# EAGLE board programmer_pcb (EAGLE 9.5.2)
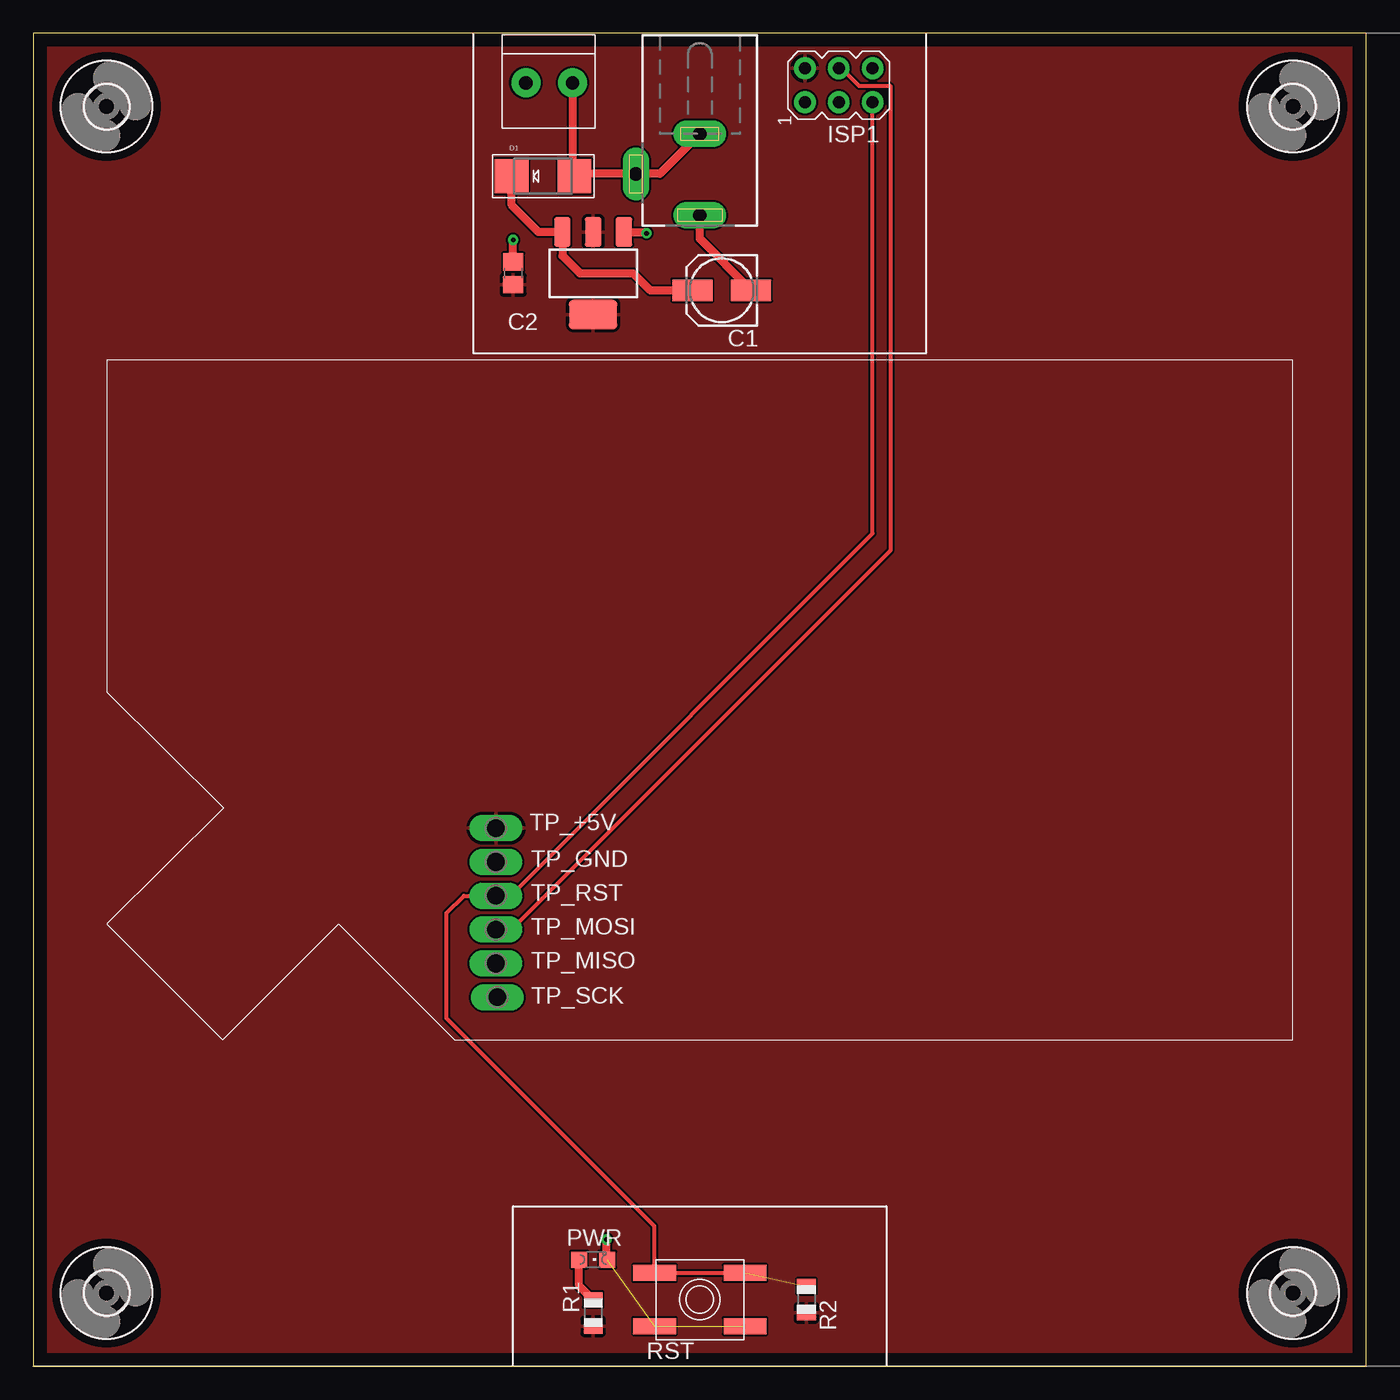
[diagram p0: board, top side]
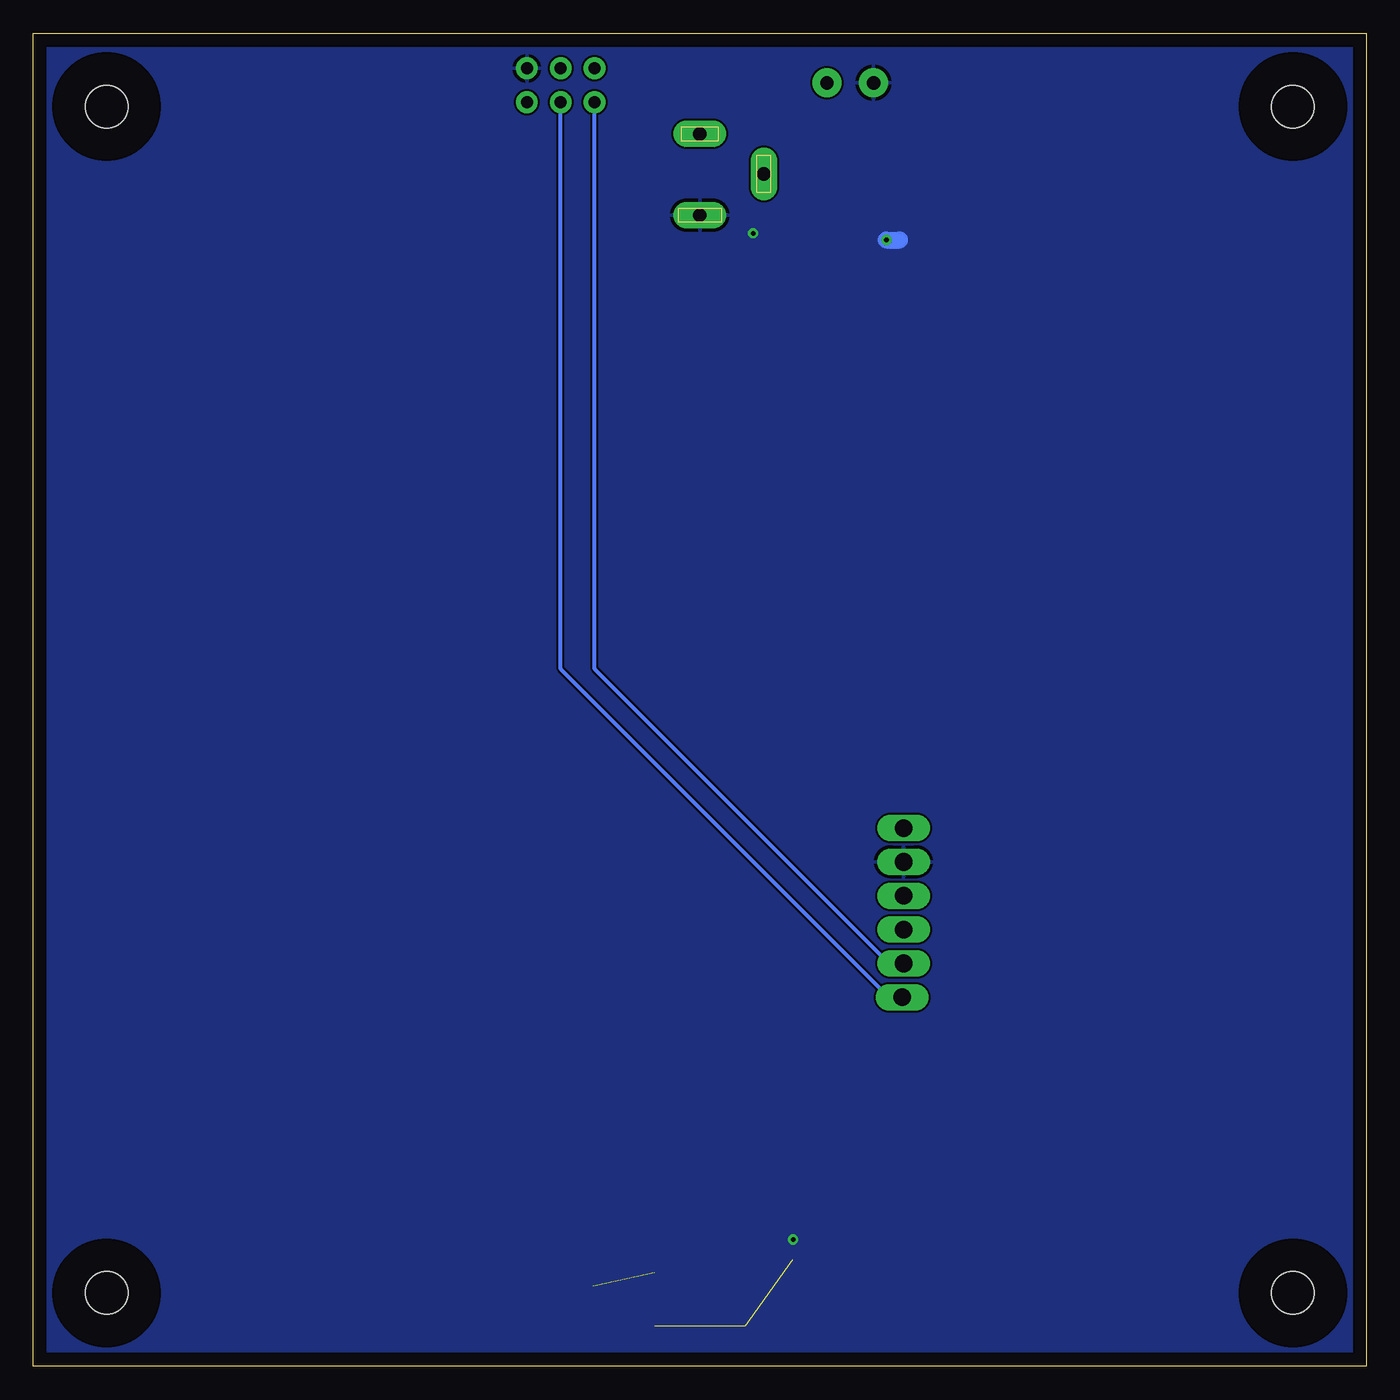
[diagram p1: board, bottom side, seen from below]

Size 100 x 100 mm. Coordinates in mm from the lower left corner, seen from the top.
Outline: 0,0 100,0 100,100 0,100 0,0
Copper layers (1*16): Top 0.035mm / dielectric 1.5mm / Bottom 0.035mm
Design rules "default": minimum track width 6mil, minimum drill 0.35mm, track to track 6mil, track to pad 6mil, pad to pad 6mil, via to via 6mil, smd to smd 6mil, copper to edge 40mil, drill to drill 6mil, minimum pad ring 10mil, minimum via ring 8mil, stop-mask expansion 4mil, vias tented up to drill 0mil, thermal gap 10mil

## Footprints (pad centres in the part's own frame; a part is rotated, then mirrored left to right if it is on the bottom)
SOT223 = smd 1.219 x 2.235: 1 -2.311,-3.099; 2 0,-3.099; 3 2.311,-3.099 | smd 3.6 x 2.2: 4 0,3.099
153CLV-0505 = smd 3 x 1.6: + 2.2,0; - -2.2,0
C0805 = smd 1.3 x 1.5: 1 -0.85,0; 2 0.85,0
SMADIODE = smd 2.54 x 2.54: A 2.349,0; C -2.349,0
3,2 = hole 3.2: 0,0
AVRISP = drill 0.9 pad 1.626: 1 -1.27,2.54; 2 1.27,2.54; 3 -1.27,0; 4 1.27,0; 5 -1.27,-2.54; 6 1.27,-2.54
1X2-3.5MM = drill 1 pad 2.184: 1 1.8,0; 2 -1.7,0
DCJ0303 = drill 1 pad 2 long: 1 0,3.1; 2 4.8,0; 3 0,-3
CHIPLED_0805 = smd 1.2 x 1.2: A 0,-1.05; C 0,1.05
R0805 = smd 1.1 x 1.4: 1 -1,0; 2 1,0
EVQ-Q2 = smd 3.2 x 1.2: A -3.4,-2; A' 3.4,-2; B -3.4,2; B' 3.4,2
P1-13Y = drill 1.321 pad 1.905 long: TP 0,0

## Placement (x,y rotation side)
5VREG  LD1117  [SOT223]  42,82 180 top
C1  0.33u  [153CLV-0505]  51.65,80.72 180 top
C2  0.1u  [C0805]  36,82 90 top
D1  [SMADIODE]  38.24,89.28 0 top
H1  MOUNT-HOLE3.2  [3,2]  5.5,5.5 0 top
H2  MOUNT-HOLE3.2  [3,2]  94.5,5.5 0 top
H3  MOUNT-HOLE3.2  [3,2]  5.5,94.5 0 top
H4  MOUNT-HOLE3.2  [3,2]  94.5,94.5 0 top
ISP1  AVRISP-6  [AVRISP]  60.43,96.11 90 top
J1  1X2-3.5MM  [1X2-3.5MM]  38.76,96.28 180 top
J2  [DCJ0303]  50,89.46 180 top
PWR  [CHIPLED_0805]  42,8 270 top
R1  10K  [R0805]  42,4 270 top
R2  220  [R0805]  58,5 270 top
RST  SPST_TACT-EVQQ2  [EVQ-Q2]  50,5 0 top
TP_+5V  TPSQPAD1-13Y  [P1-13Y]  34.71,40.38 270 top
TP_GND  TPSQPAD1-13Y  [P1-13Y]  34.71,37.84 90 top
TP_MISO  TPSQPAD1-13Y  [P1-13Y]  34.71,30.21 90 top
TP_MOSI  TPSQPAD1-13Y  [P1-13Y]  34.71,32.76 90 top
TP_RST  TPSQPAD1-13Y  [P1-13Y]  34.71,35.3 90 top
TP_SCK  TPSQPAD1-13Y  [P1-13Y]  34.81,27.68 90 top

## Library data of the parts
5VREG = LD1117; AVAILABILITY: Unavailable; DESCRIPTION: Linear Voltage Regulator IC 1 Output 800mA SOT-223; MF: STMicroelectronics; MP: LD1117; PACKAGE: SOT-223 STMicroelectronics; PRICE: None
C1 = rcl; SPICEPREFIX: C
C2 D1 ISP1 J1 PWR R1 R2 RST = adafruit
H1-H4 = holes
J2 = con-jack; OC_FARNELL: unknown; OC_NEWARK: unknown
TP_+5V TP_GND TP_MISO TP_MOSI TP_RST TP_SCK = testpad

## Nets
+5V: 5VREG.2 5VREG.4 C2.1 ISP1.2 R1.2 R2.2 TP_+5V.TP
GND: 5VREG.1 C1.- C2.2 ISP1.6 J1.1 J2.1 PWR.C RST.A RST.A' TP_GND.TP
MISO: ISP1.1 TP_MISO.TP
MOSI: ISP1.4 TP_MOSI.TP
N$1: PWR.A R1.1
N$2: D1.A J1.2 J2.2 J2.3
RESET: ISP1.5 R2.1 RST.B RST.B' TP_RST.TP
SCK: ISP1.3 TP_SCK.TP
V+: 5VREG.3 C1.+ D1.C

## Tracks (layer width: path | path; a pad name or v marks a point on that pad's centre or on a via)
+5V
  pour Top: 0,100 0,0 100,0 100,100
GND  (via drill 0.35)  (2 unrouted)
  Top 0.61: C1.- 50,84.58 J2.1 | C2.2 v36,84.5 | 5VREG.1 45.9,85.1 v46,85 | PWR.C 43,8.05 v43,9.5
  Bottom 1.27: v36,84.5 35,84.5
  pour Bottom: 0,100 0,0 100,0 100,100
MISO
  Bottom 0.305: TP_MISO.TP 35.79,30.21 57.89,52.31 ISP1.1
MOSI
  Top 0.305: ISP1.4 60.62,97.38 61.95,96.06 64.29,96.06 64.29,61.19 35.85,32.75 TP_MOSI.TP
N$1
  Top 0.61: R1.1 40.95,6.05 PWR.A
N$2
  Top 0.61: J1.2 40.45,89.55 40.5,89.5 40.54,89.46 | 40.54,89.46 41,89 40.86,89 D1.A | J2.3 47,89.46 J2.2 40.54,89.46
RESET  (1 unrouted)
  Top 0.305: ISP1.5 62.97,62.47 35.8,35.3 TP_RST.TP 32.3,35.3 31,34 31,26.1 46.6,10.5 RST.B RST.B'
SCK
  Bottom 0.305: TP_SCK.TP 35.79,27.68 60.43,52.31 ISP1.3
V+
  Top 0.61: C1.+ 46.28,80.72 45,82 41,82 39.69,83.31 5VREG.3 37.9,85.1 35.89,87.11 D1.C